# Altium PCB PCB-15_19_prototyp1.PcbDoc (part 4 of 4)
Units mm, origin at the board's own origin, x right, y up, seen from the top; angles counter-clockwise.
Board outline 190 x 150 mm, 8 copper layers (Top Layer, VCC3V3, Layer 2, layer 3, layer 4, layer 5, GND, Bottom Layer), stack 1.682 mm thick; 129 components, 396 nets, 1206 pads, 615 vias.
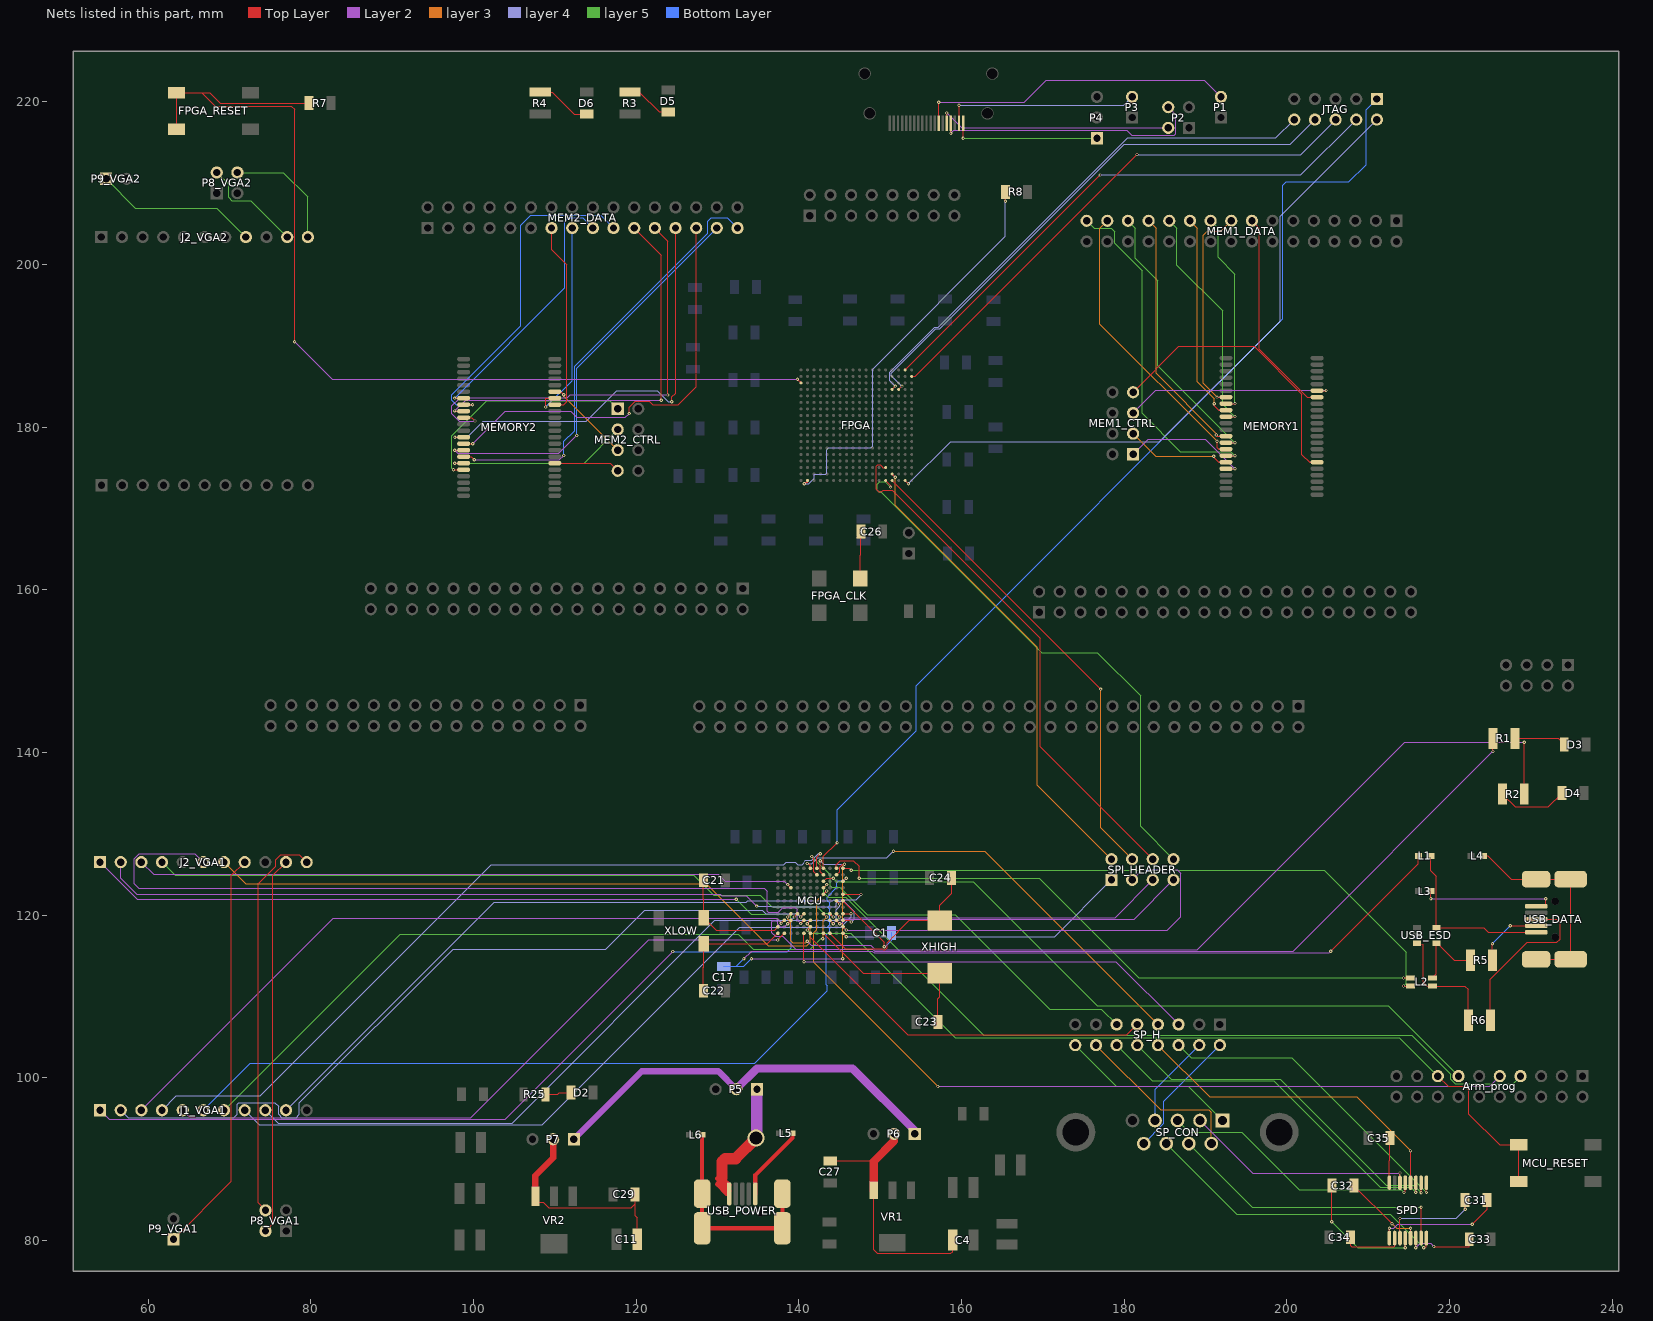
[diagram p10: the nets of this part, all layers, seen from the top]

## Via types
v1: diameter 0.4, hole 0.2, Top Layer to Bottom Layer, 599 vias
v2: diameter 0.4, hole 0.2, Top Layer to Bottom Layer, tented top, 8 vias
v3: diameter 7, hole 5, Top Layer to Bottom Layer, 4 vias
v4: diameter 1.3, hole 0.9, Top Layer to Bottom Layer, 3 vias
v5: diameter 2.1, hole 1.6, Top Layer to Bottom Layer, 1 vias

## Nets (pads, with @x,y where several pads share a name; then routed paths per layer and width w, separated by ;. In a path a pad name is that pad's centre, name@x,y a point inside that pad or via, vN(x,y) a via of type N, cw(c..) or ccw(c..) an arc to the next point about the centre after c; other vN are vias at no path point) (continued)
I_MEMORY.BUS6_Data_mem2: MEM2_DATA.13 MEMORY2.15 | length 23.7
  Top Layer w0.1: MEM2_DATA.13@109.601,204.47 109.601,201.831 111.455,199.977 111.455,183.143 111.071,182.759 MEMORY2.15@109.994,182.759
I_MEMORY.BUS7_Data_mem1: MEM1_DATA.15 MEMORY1.16 | length 25.7
  Top Layer w0.1: MEM1_DATA.15@195.707,205.359 196.621,204.445 196.621,189.553 202.489,183.686 MEMORY1.16@203.72,183.686
I_MEMORY.BUS7_Data_mem2: MEM2_DATA.15 MEMORY2.16 | length 25.5
  Top Layer w0.1: v1(108.89,182.474) 108.89,183.552 108.897,183.559 MEMORY2.16@109.994,183.559
  Bottom Layer w0.1: v1(108.89,182.474) 112.141,185.725 MEM2_DATA.15@112.141,204.47
I_MEMORY.BUS8_Data_mem1: MEM1_DATA.17 MEMORY1.29 | length 25.9
  Top Layer w0.1: v1(191.421,183.686) MEMORY1.29@192.52,183.686
  layer 3 w0.1: v1(191.421,183.686) 189.713,185.395 189.713,203.606 190.195,204.089 191.897,204.089 MEM1_DATA.17@193.167,205.359
I_MEMORY.BUS8_Data_mem2: MEM2_DATA.17 MEMORY2.29 | length 32.6
  Top Layer w0.1: v1(97.688,183.566) 97.695,183.559 MEMORY2.29@98.794,183.559
  Bottom Layer w0.1: v1(97.688,183.566) 111.227,197.104 111.227,205.232 111.735,205.74 113.411,205.74 MEM2_DATA.17@114.681,204.47
I_MEMORY.BUS9_Data_mem1: MEM1_DATA.19 MEMORY1.30 | length 24.8
  Top Layer w0.1: MEMORY1.30@192.52,182.886 v1(193.624,182.886)
  layer 5 w0.1: MEM1_DATA.19@190.627,205.359 191.541,204.445 191.541,200.863 193.624,198.78 v1(193.624,182.886)
I_MEMORY.BUS9_Data_mem2: MEM2_DATA.19 MEMORY2.30 | length 41.5
  Top Layer w0.1: MEMORY2.30@98.794,182.759 99.886,182.759 v1(99.892,182.753)
  Bottom Layer w0.1: v1(99.892,182.753) 97.866,182.753 97.333,183.286 97.333,183.998 105.791,192.456 105.791,204.826 107.01,206.045 115.646,206.045 MEM2_DATA.19@117.221,204.47
I_MEMORY.BUS10_Data_mem1: MEM1_DATA.21 MEMORY1.31 | length 25.6
  Top Layer w0.1: v1(191.06,182.88) 191.06,182.644 191.618,182.086 MEMORY1.31@192.52,182.086
  layer 3 w0.1: MEM1_DATA.21@188.087,205.359 189.001,204.445 189.001,185.572 191.06,183.514 v1(191.06,182.88)
I_MEMORY.BUS10_Data_mem2: MEM2_DATA.21 MEMORY2.31 | length 49.6
  Top Layer w0.1: v1(97.708,181.985) 97.735,181.959 MEMORY2.31@98.794,181.959 ; MEM2_DATA.21@119.761,204.47 123.088,201.143 v1(123.088,183.312)
  Layer 2 w0.1: v1(97.708,181.985) 99.035,183.312 v1(123.088,183.312)
I_MEMORY.BUS11_Data_mem1: MEM1_DATA.23 MEMORY1.32 | length 28.5
  Top Layer w0.1: MEMORY1.32@192.52,181.286 v1(193.624,181.286)
  layer 5 w0.1: MEM1_DATA.23@185.547,205.359 186.461,204.445 186.461,199.923 192.106,194.278 192.106,182.804 v1(193.624,181.286)
I_MEMORY.BUS11_Data_mem2: MEM2_DATA.23 MEMORY2.32 | length 54
  Top Layer w0.1: MEMORY2.32@98.794,181.159 99.779,181.159 v1(100.191,180.746) ; MEM2_DATA.23@122.301,204.47 123.901,202.87 v1(123.901,183.947)
  Layer 2 w0.1: v1(100.191,180.746) 98.273,180.746 97.358,181.661 97.358,182.601 98.36,183.603 111.528,183.603 111.873,183.947 v1(123.901,183.947)
I_MEMORY.BUS12_Data_mem1: MEM1_DATA.25 MEMORY1.35 | length 31
  Top Layer w0.1: v1(191.31,179.03) 191.454,178.886 MEMORY1.35@192.52,178.886
  layer 3 w0.1: MEM1_DATA.25@183.007,205.359 183.921,204.445 183.921,186.588 191.31,179.2 v1(191.31,179.03)
I_MEMORY.BUS12_Data_mem2: MEM2_DATA.25 MEMORY2.35 | length 52.2
  Top Layer w0.1: v1(97.713,178.765) 97.719,178.759 MEMORY2.35@98.794,178.759 ; v1(124.37,183.11) 124.37,183.704 124.841,184.175 MEM2_DATA.25@124.841,204.47
  layer 4 w0.1: v1(97.713,178.765) 99.227,178.765 101.182,180.721 113.894,180.721 117.627,184.455 122.583,184.455 123.927,183.11 v1(124.37,183.11)
I_MEMORY.BUS13_Data_mem1: MEM1_DATA.27 MEMORY1.36 | length 33.8
  Top Layer w0.1: MEMORY1.36@192.52,178.086 v1(193.624,178.086)
  layer 5 w0.1: MEM1_DATA.27@180.467,205.359 181.381,204.445 181.381,200.787 184.15,198.018 184.15,187.56 v1(193.624,178.086)
I_MEMORY.BUS13_Data_mem2: MEM2_DATA.27 MEMORY2.36 | length 52.4
  Top Layer w0.1: MEMORY2.36@98.794,177.959 99.892,177.959 v1(99.898,177.952) ; v1(119.151,181.661) 119.151,182.423 119.888,183.159 121.615,183.159 122.015,182.76 125.153,182.76 127.381,184.988 MEM2_DATA.27@127.381,204.47
  Layer 2 w0.1: v1(99.898,177.952) 103.911,181.966 111.938,181.966 112.708,181.195 118.686,181.195 v1(119.151,181.661)
I_MEMORY.BUS14_Data_mem1: MEM1_DATA.29 MEMORY1.37 | length 35.4
  Top Layer w0.1: v1(191.414,178.257) 191.414,177.489 191.618,177.286 MEMORY1.37@192.52,177.286
  layer 3 w0.1: MEM1_DATA.29@177.927,205.359 177.013,204.445 177.013,192.659 v1(191.414,178.257)
I_MEMORY.BUS14_Data_mem2: MEM2_DATA.29 MEMORY2.37 | length 49.8
  Top Layer w0.1: v1(97.688,177.165) 97.694,177.159 MEMORY2.37@98.794,177.159
  Layer 2 w0.1: v1(97.688,177.165) 98.095,176.759 110.49,176.759 v1(112.7,178.968)
  Bottom Layer w0.1: v1(112.7,178.968) 112.7,187.249 MEM2_DATA.29@129.921,204.47
I_MEMORY.BUS15_Data_mem1: MEM1_DATA.31 MEMORY1.38 | length 42.4
  Top Layer w0.1: MEMORY1.38@192.52,176.486 v1(193.624,176.486)
  layer 5 w0.1: MEM1_DATA.31@175.387,205.359 176.301,204.445 178.41,204.445 178.841,204.013 178.841,202.59 182.22,199.212 182.22,181.686 186.919,176.987 193.123,176.987 v1(193.624,176.486)
I_MEMORY.BUS15_Data_mem2: MEM2_DATA.31 MEMORY2.38 | length 53.2
  Top Layer w0.1: MEMORY2.38@98.794,176.359 99.714,176.359 v1(100.101,175.971)
  Layer 2 w0.1: v1(100.101,175.971) 110.566,175.971 v1(111.1,176.505)
  Bottom Layer w0.1: v1(111.1,176.505) 111.1,178.232 112.42,179.553 112.42,187.452 128.803,203.835 128.803,205.308 129.235,205.74 131.191,205.74 MEM2_DATA.31@132.461,204.47
I_MEMORY.ENABLE_Data_mem1: MEM1_CTRL.7 MEMORY1.6 | length 35.2
  Top Layer w0.1: MEM1_CTRL.7@181.102,184.277 186.741,189.916 195.97,189.916 201.864,184.023 201.864,176.616 202.794,175.686 MEMORY1.6@203.72,175.686
I_MEMORY.ENABLE_Data_mem2: MEM2_CTRL.7 MEMORY2.6 | length 8.1
  Top Layer w0.1: MEMORY2.6@109.994,175.559 116.795,175.559 MEM2_CTRL.7@117.729,174.625
I_MEMORY.LB_Data_mem1: MEM1_CTRL.3 MEMORY1.39 | length 12.9
  Top Layer w0.1: v1(191.008,176.403) 191.008,176.296 191.618,175.686 MEMORY1.39@192.52,175.686
  layer 3 w0.1: MEM1_CTRL.3@181.102,179.197 183.896,176.403 v1(191.008,176.403)
I_MEMORY.LB_Data_mem2: MEM2_CTRL.3 MEMORY2.39 | length 22.9
  Top Layer w0.1: v1(97.688,175.565) 97.694,175.559 MEMORY2.39@98.794,175.559
  layer 5 w0.1: v1(97.688,175.565) 113.589,175.565 MEM2_CTRL.3@117.729,179.705
I_MEMORY.UB_Data_mem1: MEM1_CTRL.1 MEMORY1.40 | length 15.9
  Top Layer w0.1: MEMORY1.40@192.52,174.886 193.617,174.886 v1(193.624,174.879)
  Layer 2 w0.1: MEM1_CTRL.1@181.102,176.657 182.956,178.511 189.992,178.511 v1(193.624,174.879)
I_MEMORY.UB_Data_mem2: MEM2_CTRL.1 MEMORY2.40 | length 28.1
  Top Layer w0.1: v1(97.536,174.759) MEMORY2.40@98.794,174.759
  layer 5 w0.1: v1(97.536,174.759) 97.333,174.962 97.333,178.918 101.625,183.21 116.764,183.21 MEM2_CTRL.1@117.729,182.245
I_MEMORY.WRITE_Data_mem1: MEM1_CTRL.5 MEMORY1.17 | length 26
  Top Layer w0.1: MEMORY1.17@203.72,184.486 204.806,184.486 v1(204.826,184.506)
  Layer 2 w0.1: MEM1_CTRL.5@181.102,181.737 183.871,184.506 v1(204.826,184.506)
I_MEMORY.WRITE_Data_mem2: MEM2_CTRL.5 MEMORY2.17 | length 10.8
  Top Layer w0.1: MEMORY2.17@109.994,184.359 110.795,184.277 v1(111.1,183.972)
  layer 3 w0.1: v1(111.1,183.972) 111.1,183.794 MEM2_CTRL.5@117.729,177.165
I_SPI.CLK: MCU.J9 SPI_HEADER.5 | length 42.1
  Top Layer w0.1: MCU.J9@143.829,119.354 144.221,118.962 v1(144.221,118.948)
  Layer 2 w0.1: v1(144.221,118.948) 144.678,119.405 145.364,119.405 145.66,119.701 178.883,119.701 SPI_HEADER.5@183.515,124.333
I_SPI.CS: MCU.J10 SPI_HEADER.7 | length 43.8
  Top Layer w0.1: MCU.J10@144.629,119.354 v1(145.034,118.948)
  Layer 2 w0.1: v1(145.034,118.948) 145.24,118.948 145.793,119.501 181.223,119.501 SPI_HEADER.7@186.055,124.333
I_SPI.RX: MCU.K11 SPI_HEADER.3 | length 54.4
  Top Layer w0.1: MCU.K11@145.429,118.554 v1(145.821,118.162)
  Layer 2 w0.1: v1(145.821,118.162) 185.319,118.162 186.969,119.812 186.969,125.171 186.538,125.603 182.245,125.603 SPI_HEADER.3@180.975,124.333
I_SPI.TX: MCU.L11 SPI_HEADER.1 | length 36.1
  Top Layer w0.1: MCU.L11@145.429,117.754 v1(145.835,117.348)
  layer 4 w0.1: v1(145.835,117.348) 171.45,117.348 SPI_HEADER.1@178.435,124.333
MCU_LEDS.LED_1: MCU.J3 R1.1 | length 105.9
  Top Layer w0.1: v1(138.633,118.948) 138.633,118.958 MCU.J3@139.029,119.354 ; v1(225.345,140.128) R1.1@225.345,141.732
  Layer 2 w0.1: v1(138.633,118.948) 138.252,118.567 137.693,118.567 137.389,118.872 137.389,119.177 137.262,119.304 136.804,119.304 136.677,119.177 136.677,117.856 137.16,117.373 138.024,117.373 139.624,115.773 149.119,115.773 149.342,115.55 200.767,115.55 v1(225.345,140.128)
MCU_LEDS.LED_2: MCU.H3 R2.1 | length 111.4
  Top Layer w0.1: v1(138.633,119.758) MCU.H3@139.029,120.154 ; R2.1@229.188,134.874 v1(229.188,141.249)
  Layer 2 w0.1: v1(141.038,116.798) 141.529,116.307 148.868,116.307 149.425,115.75 188.978,115.75 214.478,141.249 v1(229.188,141.249)
  layer 3 w0.1: v1(138.633,119.758) 138.633,119.46 139.014,119.079 139.014,116.84 139.257,116.598 140.838,116.598 v1(141.038,116.798)
MCU_VGA-I/O.J1_P2: J1_VGA1.9 MCU.F10 | length 83.9
  Top Layer w0.1: MCU.F10@144.629,121.754 145.022,121.361 v1(145.034,121.361)
  layer 4 w0.1: J1_VGA1.9@74.41,96.012 75.985,94.437 104.75,94.437 129.692,119.38 144.526,119.38 144.628,119.482 144.628,120.653 145.034,121.059 v1(145.034,121.361)
MCU_VGA-I/O.J1_P3: J1_VGA1.10 MCU.E11 | length 83.9
  Top Layer w0.1: MCU.E11@145.429,122.554 147.626,122.554 v1(147.65,122.53)
  layer 4 w0.1: J1_VGA1.10@76.95,96.012 102.523,121.585 133.538,121.585 133.746,121.793 144.16,121.793 144.278,121.911 147.032,121.911 v1(147.65,122.53)
MCU_VGA-I/O.J1_P8: J1_VGA1.8 MCU.H11 | length 87.2
  Top Layer w0.1: MCU.H11@145.429,120.154 v1(146.419,120.154)
  layer 4 w0.1: J1_VGA1.8@71.87,96.012 73.648,94.234 108.458,94.234 132.74,118.516 145.161,118.516 146.419,119.774 v1(146.419,120.154)
MCU_VGA-I/O.J1_P9: J1_VGA1.7 MCU.H8 | length 87.3
  Top Layer w0.1: MCU.H8@143.029,120.154 143.422,119.761 v1(143.434,119.761)
  layer 5 w0.1: J1_VGA1.7@69.33,96.012 90.971,117.653 132.563,117.653 134.391,115.824 141.402,115.824 142.668,117.09 v1(142.94,117.09)
  layer 3 w0.1: v1(142.94,117.09) 143.002,117.152 143.002,119.329 v1(143.434,119.761)
MCU_VGA-I/O.J1_P10: J1_VGA1.6 MCU.C11 | length 99.6
  Top Layer w0.1: MCU.C11@145.429,124.154 145.811,124.536 v1(145.821,124.536)
  Bottom Layer w0.1: J1_VGA1.6@66.79,96.012 72.556,101.778 134.569,101.778 143.49,110.699 143.49,111.33 143.376,111.444 143.376,117.606 143.779,118.009 143.779,118.299 143.535,118.543 143.535,118.556 143.784,118.804 143.784,119.094 143.559,119.319 143.559,119.391 143.784,119.616 143.784,119.906 143.553,120.137 143.553,120.183 143.779,120.409 143.779,120.699 143.538,120.94 143.538,120.968 143.779,121.209 143.779,121.499 143.49,121.788 143.49,122.205 144.678,123.393 144.678,124.003 144.882,124.206 145.491,124.206 v1(145.821,124.536)
MCU_VGA-I/O.J1_P11: J1_VGA1.5 MCU.L2 | length 83.7
  Top Layer w0.1: v1(137.417,116.942) MCU.L2@138.229,117.754
  Layer 2 w0.1: J1_VGA1.5@64.25,96.012 65.164,95.098 99.678,95.098 121.522,116.942 v1(137.417,116.942)
MCU_VGA-I/O.J1_P12: J1_VGA1.4 MCU.A7 | length 96.2
  Top Layer w0.1: MCU.A7@142.229,125.754 142.229,127.141 v1(142.621,127.533)
  layer 4 w0.1: J1_VGA1.4@61.71,96.012 63.463,97.765 73.762,97.765 102.159,126.162 138.125,126.162 138.481,126.517 139.572,126.517 139.883,126.206 140.411,126.206 140.593,126.387 140.818,126.721 141.597,126.721 142.41,127.533 v1(142.621,127.533)
MCU_VGA-I/O.J1_P13: J1_VGA1.3 MCU.J2 | length 89.3
  Top Layer w0.1: v1(137.82,118.99) 137.865,118.99 MCU.J2@138.229,119.354
  Layer 2 w0.1: J1_VGA1.3@59.17,96.012 82.757,119.599 137.271,119.599 137.82,119.05 v1(137.82,118.99)
MCU_VGA-I/O.J1_P14: J1_VGA1.2 MCU.H5 | length 99.1
  Top Layer w0.1: v1(140.233,119.761) 140.236,119.761 MCU.H5@140.629,120.154
  layer 4 w0.1: J1_VGA1.2@56.63,96.012 57.57,95.072 70.536,95.072 70.968,95.504 70.968,96.723 71.171,96.926 75.59,96.926 76.048,96.469 76.048,95.504 76.454,95.098 78.181,95.098 78.588,95.504 78.588,96.901 97.511,115.824 116.281,115.824 121.031,120.574 135.509,120.574 135.915,120.167 139.827,120.167 v1(140.233,119.761)
MCU_VGA-I/O.J1_P15: J1_VGA1.1 MCU.H4 | length 98.7
  Top Layer w0.1: v1(139.421,119.761) 139.436,119.761 MCU.H4@139.829,120.154
  Layer 2 w0.1: J1_VGA1.1@54.09,96.012 55.208,94.894 103.886,94.894 v1(124.511,115.519)
  Bottom Layer w0.1: v1(124.511,115.519) 138.582,115.519 139.04,115.976 139.04,119.38 v1(139.421,119.761)
MCU_VGA-I/O.J2_P0: J2_VGA1.6 MCU.J5 | length 99.5
  Top Layer w0.1: v1(140.233,118.958) MCU.J5@140.629,119.354
  Layer 2 w0.1: J2_VGA1.6@66.79,126.51 65.741,127.559 58.928,127.559 58.268,126.898 58.268,123.876 58.826,123.317 135.738,123.317 136.124,122.93 136.124,120.472 136.246,120.351 137.47,120.351 138.024,120.904 139.576,120.904 139.779,120.701 139.779,119.413 v1(140.233,118.958)
MCU_VGA-I/O.J2_P1: J2_VGA1.7 MCU.J6 | length 79.5
  Top Layer w0.1: v1(141.023,118.946) 141.023,118.948 MCU.J6@141.429,119.354
  layer 3 w0.1: J2_VGA1.7@69.33,126.51 72.015,123.825 128.626,123.825 136.22,116.23 140.995,116.23 141.402,116.637 141.402,118.567 v1(141.023,118.946)
MCU_VGA-I/O.J2_P4: J2_VGA1.3 MCU.D3 | length 81.2
  Top Layer w0.1: v1(138.633,123.749) MCU.D3@139.029,123.354
  Layer 2 w0.1: J2_VGA1.3@59.17,126.51 60.661,125.019 130.096,125.019 130.96,124.155 138.227,124.155 v1(138.633,123.749)
MCU_VGA-I/O.J2_P5: J2_VGA1.2 MCU.J11 | length 97.2
  Top Layer w0.1: MCU.J11@145.429,119.354 146.228,119.354 v1(146.431,119.151)
  Layer 2 w0.1: J2_VGA1.2@56.63,126.51 56.63,124.523 58.572,122.58 130.327,122.58 130.531,122.377 133.553,122.377 v1(134.823,121.107)
  layer 4 w0.1: v1(134.823,121.107) 136.677,121.107 136.781,121.004 144.577,121.004 144.628,121.055 144.628,121.457 144.882,121.711 145.497,121.711 146.787,120.421 146.787,119.507 v1(146.431,119.151)
MCU_VGA-I/O.J2_P6: J2_VGA1.4 MCU.H9 | length 85.9
  Top Layer w0.1: MCU.H9@143.829,120.154 v1(144.221,119.761)
  layer 5 w0.1: J2_VGA1.4@61.71,126.51 63.303,124.917 127.051,124.917 129.54,122.428 135.255,122.428 136.677,121.006 142.277,121.006 143.078,120.204 143.778,120.204 v1(144.221,119.761)
MCU_VGA-I/O.J2_P7: J2_VGA1.1 MCU.H10 | length 94.8
  Top Layer w0.1: MCU.H10@144.629,120.154 145.022,119.761 v1(145.034,119.761)
  Layer 2 w0.1: J2_VGA1.1@54.09,126.51 58.655,121.945 v1(132.309,121.945)
  layer 5 w0.1: v1(132.309,121.945) 134.137,120.117 138.786,120.117 138.989,119.913 138.989,119.609 139.243,119.355 144.628,119.355 v1(145.034,119.761)
Net_13: ?.13 P1.2 | length 39.3
  Top Layer w0.1: ?.13@157.195,217.367 v1(157.195,219.939)
  Layer 2 w0.1: v1(157.195,219.939) 167.716,219.939 170.434,222.656 189.84,222.656 P1.2@191.897,220.599
Net_15: ?.15 P2.2 | length 29.2
  Top Layer w0.1: v1(158.191,218.618) 158.195,218.614 ?.15@158.195,217.367
  Layer 2 w0.1: v1(158.191,218.618) 160.02,216.789 P2.2@185.42,216.789
Net_16: ?.16 P2.4 | length 33
  Top Layer w0.1: ?.16@158.695,217.367 158.695,216.133 v1(158.699,216.129)
  Layer 2 w0.1: v1(158.699,216.129) 159.055,216.484 180.315,216.484 180.924,215.875 186.131,215.875 186.334,216.078 186.334,218.415 P2.4@185.42,219.329
Net_18: ?.18 P3.2 | length 23.9
  Top Layer w0.1: ?.18@159.695,217.367 v1(159.695,219.583)
  layer 4 w0.1: v1(159.695,219.583) 179.959,219.583 P3.2@180.975,220.599
Net_19: ?.19 P4.1 | length 18.3
  Top Layer w0.1: v1(160.195,215.519) ?.19@160.195,217.367
  layer 5 w0.1: v1(160.195,215.519) P4.1@176.657,215.519
NetArm_prog_7: Arm_prog.7 MCU.D8 | length 97.8
  Top Layer w0.1: MCU.D8@143.029,123.354 143.424,123.749 v1(143.434,123.749)
  layer 5 w0.1: v1(143.434,123.749) 143.078,123.393 143.078,122.733 143.637,122.174 145.796,122.174 162.738,105.232 215.338,105.232 220.153,100.417 220.153,99.811 220.675,99.289 227.813,99.289 Arm_prog.7@228.727,100.203
NetArm_prog_9: Arm_prog.9 MCU.E8 | length 101.2
  Top Layer w0.1: MCU.E8@143.029,122.554 143.434,122.959 v1(143.434,122.961)
  Layer 2 w0.1: v1(157.099,98.933) 224.917,98.933 Arm_prog.9@226.187,100.203
  layer 3 w0.1: v1(143.434,122.961) 142.215,121.742 142.215,118.212 141.859,117.856 141.859,114.173 v1(157.099,98.933)
NetArm_prog_13: Arm_prog.13 MCU.C8 | length 88.3
  Top Layer w0.1: MCU.C8@143.029,124.154 143.411,124.536 v1(144.247,124.536)
  layer 5 w0.1: v1(144.247,124.536) 144.678,124.104 161.442,124.104 176.708,108.839 212.471,108.839 Arm_prog.13@221.107,100.203
NetArm_prog_15: Arm_prog.15 MCU.K6 MCU_RESET.1 MCU_RESET.3 | length 105.2
  Top Layer w0.1: v1(141.021,118.161) 141.036,118.161 MCU.K6@141.429,118.554 ; Arm_prog.15@218.567,100.203 219.837,98.933 221.894,98.933 222.377,98.45 222.377,95.534 226.162,91.749 MCU_RESET.3@228.517,91.749 MCU_RESET.1@228.517,87.249
  layer 5 w0.1: v1(141.021,118.161) 141.427,117.754 146.406,117.754 159.233,104.927 213.843,104.927 Arm_prog.15@218.567,100.203
NetC1_1: C1.1 MCU.F11 | length 9.9
  Top Layer w0.1: MCU.F11@145.429,121.754 150.5,116.683 v1(150.5,116.1)
  Bottom Layer w0.1: v1(150.5,116.1) 150.613,116.1 151.415,116.902 C1.1@151.415,117.817
NetC4_2: C4.2 C27.2 P6.2 VR1.3 | length 35.4
  Top Layer w0.1: C27.2@143.86,89.77 148.742,89.77 149.211,89.301 VR1.3@149.211,86.156 149.211,78.842 149.643,78.41 158.699,78.41 158.915,78.626 C4.2@158.915,80.04 ; 151.71,92.22 P6.2@151.71,93.1
  Top Layer w1: VR1.3@149.211,86.156 149.211,89.721 151.71,92.22
NetC11_2: C11.2 C29.2 P7.2 VR2.3 | length 27
  Top Layer w0.1: VR2.3@107.606,85.406 107.606,84.709 108.585,84.709 109.245,84.049 119.397,84.049 119.88,84.531 ; C29.2@119.88,85.66 119.88,84.531 ; C11.2@120.125,80.15 120.125,82.779 119.88,83.024 119.88,84.531
  Top Layer w0.8: VR2.3@107.606,85.406 107.606,87.966 109.8,90.16 P7.2@109.8,92.44
NetC17_2: C17.2 L1.1 MCU.B8 MCU.B10 | length 123.8
  Top Layer w0.1: v1(142.646,126.67) 142.646,125.337 MCU.B8@143.029,124.954 ; MCU.B10@144.629,124.954 145.034,125.359 145.034,125.908 145.39,126.263 v1(145.618,126.263) ; v1(205.41,115.57) 216.163,126.323 L1.1@216.163,127.271
  Layer 2 w0.1: v1(133.248,114.63) 134.188,115.57 149.039,115.57 149.259,115.35 205.19,115.35 v1(205.41,115.57) ; v1(134.173,114.63) v1(145.415,114.63)
  layer 3 w0.1: v1(145.415,114.63) 145.415,126.06 v1(145.618,126.263)
  layer 4 w0.1: v1(142.646,126.67) 143.053,126.263 v1(145.618,126.263)
  Bottom Layer w0.1: C17.2@130.761,113.706 132.324,113.706 ; v1(133.248,114.63) 132.324,113.706 ; v1(134.173,114.63) 133.248,113.706 132.324,113.706
NetC21_2: C21.2 MCU.K1 XLOW.1 | length 14.6
  Top Layer w0.1: C21.2@128.268,124.294 128.268,121.981 128.304,121.945 XLOW.1@128.304,119.671 128.304,119.659 129.828,118.135 137.01,118.135 MCU.K1@137.429,118.554
NetC22_2: C22.2 MCU.L1 XLOW.4 | length 15.4
  Top Layer w0.1: C22.2@128.268,110.705 128.268,113.563 128.304,113.599 XLOW.4@128.304,116.459 ; XLOW.4@128.304,116.471 XLOW.4@128.304,116.459 ; MCU.L1@137.429,117.754 136.134,116.459 XLOW.4@128.304,116.459
NetC23_2: C23.2 MCU.L8 XHIGH.1 | length 22.4
  Top Layer w0.1: MCU.L8@143.029,117.754 147.943,112.84 XHIGH.1@157.33,112.84 157.33,109.968 157.09,109.728 C23.2@157.09,106.87
NetC24_2: C24.2 MCU.L9 XHIGH.2 | length 22
  Top Layer w0.1: MCU.L9@143.829,117.754 145.713,115.87 150.235,115.87 150.355,115.75 150.645,115.75 150.85,115.955 150.85,116.585 153.605,119.34 XHIGH.2@157.33,119.34 157.33,121.209 158.79,122.669 C24.2@158.79,124.57
NetC31_1: C31.1 SPD.3 | length 12
  Top Layer w0.1: SPD.3@213.909,80.293 v1(213.909,82.702) ; C31.1@221.916,84.963 221.916,83.824 v1(221.92,83.82)
  layer 4 w0.1: v1(213.909,82.702) 220.802,82.702 v1(221.92,83.82)
NetC31_2: C31.2 SPD.1 | length 15.3
  Top Layer w0.1: SPD.1@212.609,80.293 v1(212.609,81.483) ; v1(222.783,81.991) 224.616,83.824 C31.2@224.616,84.963
  Layer 2 w0.1: v1(212.609,81.483) 213.157,81.483 213.665,81.991 v1(222.783,81.991)
NetC32_1: C32.1 SPD.5 | length 10.4
  Top Layer w0.1: C32.1@208.233,86.741 v1(212.932,82.042) ; SPD.5@215.209,80.293 215.209,81.478 v1(215.214,81.483)
  layer 3 w0.1: v1(212.932,82.042) 213.491,81.483 v1(215.214,81.483)
NetC32_2: C32.2 SPD.4 | length 16
  Top Layer w0.1: v1(205.533,82.296) C32.2@205.533,86.741 ; v1(214.554,79.096) 214.559,79.101 SPD.4@214.559,80.293
  layer 5 w0.1: v1(205.533,82.296) 208.733,79.096 v1(214.554,79.096)
NetC33_2: C33.2 SPD.6 | length 9.1
  Top Layer w0.1: v1(215.849,79.096) 215.859,79.105 SPD.6@215.859,80.293 ; v1(218.084,79.248) 222.424,79.248 C33.2@222.424,80.137
  Layer 2 w0.1: v1(215.849,79.096) 216.408,79.654 217.678,79.654 v1(218.084,79.248)
NetC34_2: C34.2 SPD.2 | length 7.6
  Top Layer w0.1: C34.2@207.852,80.391 207.852,79.321 207.975,79.198 213.157,79.198 213.259,79.301 SPD.2@213.259,80.293
NetC35_2: C35.2 SPD.16 | length 5.5
  Top Layer w0.1: SPD.16@212.609,87.093 212.609,89.789 212.678,89.858 C35.2@212.678,92.583
NetD2_1: D2.1 R25.2 | length 3.2
  Top Layer w0.1: R25.2@108.86,97.96 108.86,97.99 110.342,97.99 110.522,98.17 D2.1@111.99,98.17
NetD3_1: D3.1 R1.2 | length 6.4
  Top Layer w0.1: R1.2@228.045,141.732 233.346,141.732 D3.1@234.108,140.97
NetD4_1: D4.1 R2.2 | length 8.7
  Top Layer w0.1: R2.2@226.488,134.874 228.063,133.299 232.152,133.299 D4.1@233.854,135.001
NetD5_1: D5.1 R3.2 | length 5.7
  Top Layer w0.1: R3.2@119.253,221.187 120.371,221.187 122.817,218.741 D5.1@123.952,218.741
NetD6_1: D6.1 R4.2 | length 6.8
  Top Layer w0.1: R4.2@108.204,221.187 109.703,221.187 112.403,218.487 D6.1@113.919,218.487
NetFPGA_A17: FPGA.A17 JTAG.4 | length 68.2
  Top Layer w0.1: FPGA.A17@153.07,187.03 v1(177.038,210.998)
  layer 4 w0.1: v1(177.038,210.998) 201.727,210.998 JTAG.4@208.534,217.805
NetFPGA_B18: FPGA.B18 JTAG.6 | length 65.2
  Top Layer w0.1: FPGA.B18@153.87,186.23 154.294,186.23 v1(181.577,213.512)
  layer 4 w0.1: v1(181.577,213.512) 201.701,213.512 JTAG.6@205.994,217.805
NetFPGA_C1: FPGA.C1 FPGA_RESET.1 FPGA_RESET.3 R7.1 | length 126.5
  Top Layer w0.1: FPGA_RESET.1@63.5,216.62 FPGA_RESET.3@63.5,221.12 66.611,221.12 ; v1(78.003,190.5) 78.003,219.05 77.597,219.456 68.275,219.456 66.611,221.12 ; R7.1@79.803,219.837 68.847,219.837 67.564,221.12 66.611,221.12 ; v1(139.823,185.877) FPGA.C1@140.27,185.43
  Layer 2 w0.1: v1(78.003,190.5) 82.626,185.877 v1(139.823,185.877)
NetFPGA_D15: FPGA.D15 JTAG.10 | length 65.2
  Top Layer w0.1: FPGA.D15@151.47,184.63 151.867,185.027 v1(151.867,185.039)
  layer 4 w0.1: v1(151.867,185.039) 151.181,185.725 151.181,186.741 156.718,192.278 157.169,192.278 180.436,215.544 198.653,215.544 JTAG.10@200.914,217.805
NetFPGA_D16: FPGA.D16 JTAG.8 | length 67.7
  Top Layer w0.1: FPGA.D16@152.27,184.63 v1(152.679,185.039)
  layer 4 w0.1: v1(152.679,185.039) 151.384,186.334 151.384,186.639 156.822,192.078 157.315,192.078 179.994,214.757 200.406,214.757 JTAG.8@203.454,217.805
NetFPGA_V2: FPGA.V2 R8.1 | length 51
  Top Layer w0.1: v1(140.665,173.025) 140.868,173.228 141.07,173.228 FPGA.V2@141.07,173.43 ; v1(165.401,207.772) R8.1@165.401,208.915
  layer 4 w0.1: v1(140.665,173.025) 141.224,173.025 141.884,173.685 141.884,174.168 141.91,174.193 143.281,174.193 143.434,174.346 143.434,177.216 143.662,177.444 148.854,177.444 149.073,177.663 149.073,187.122 165.401,203.45 v1(165.401,207.772)
NetFPGA_V17: FPGA.V17 JTAG.2 | length 84.2
  Top Layer w0.1: FPGA.V17@153.07,173.43 v1(153.471,173.029)
  layer 4 w0.1: v1(153.471,173.029) 158.648,178.206 184.328,178.206 199.161,193.04 199.161,205.892 JTAG.2@211.074,217.805
NetJ2_VGA1_8: J2_VGA1.8 P9_VGA1.1 | length 50
  Top Layer w0.1: P9_VGA1.1@63.119,80.137 70.231,87.249 70.231,124.871 J2_VGA1.8@71.87,126.51
NetJ2_VGA1_10: J2_VGA1.10 P8_VGA1.2 | length 46.4
  Top Layer w0.1: P8_VGA1.2@74.422,81.153 75.336,82.067 75.336,124.896 J2_VGA1.10@76.95,126.51
NetJ2_VGA1_11: J2_VGA1.11 P8_VGA1.4 | length 48.8
  Top Layer w0.1: P8_VGA1.4@74.422,83.693 73.508,84.607 73.508,123.85 75.667,126.009 75.667,126.797 76.302,127.432 78.568,127.432 J2_VGA1.11@79.49,126.51
NetJ2_VGA2_8: J2_VGA2.8 P9_VGA2.1 | length 20.2
  layer 5 w0.1: P9_VGA2.1@54.83,210.52 58.416,206.934 68.446,206.934 J2_VGA2.8@72.02,203.36
NetJ2_VGA2_10: J2_VGA2.10 P8_VGA2.2 | length 12.9
  layer 5 w0.1: P8_VGA2.2@68.43,211.3 69.901,209.829 69.901,208.255 70.307,207.848 72.612,207.848 J2_VGA2.10@77.1,203.36
NetJ2_VGA2_11: J2_VGA2.11 P8_VGA2.4 | length 14.8
  layer 5 w0.1: P8_VGA2.4@70.97,211.3 76.632,211.3 79.64,208.292 J2_VGA2.11@79.64,203.36
NetJTAG_1: JTAG.1 MCU.A8 | length 127.3
  Top Layer w0.1: MCU.A8@143.029,125.754 143.029,127.235 v1(144.704,128.91)
  Bottom Layer w0.1: v1(144.704,128.91) 144.704,132.944 154.432,142.672 154.432,148.209 199.517,193.294 199.517,209.702 199.949,210.134 207.62,210.134 209.753,212.268 209.753,219.024 JTAG.1@211.074,220.345
NetL1_2: L1.2 USB_DATA.1 USB_ESD.5 | length 21.6
  Top Layer w0.1: L1.2@217.713,127.271 217.713,125.451 218.392,124.772 USB_ESD.5@218.392,118.442 224.231,118.442 224.783,117.89 USB_DATA.1@230.67,117.89
NetL2_1: L2.1 MCU.A10 | length 78.1
  Top Layer w0.1: MCU.A10@144.629,125.754 144.629,126.214 145.11,126.695 146.71,126.695 147.422,125.984 v1(147.422,124.536) ; v1(214.351,112.268) 214.36,112.277 L2.1@215.207,112.277
  layer 5 w0.1: v1(147.422,124.536) 169.545,124.536 181.813,112.268 v1(214.351,112.268)
NetL2_2: L2.2 R5.1 USB_ESD.4 | length 9.5
  Top Layer w0.1: L2.2@217.907,112.277 218.392,112.762 USB_ESD.4@218.392,116.542 218.491,116.542 220.606,114.427 222.573,114.427 R5.1@222.573,114.444
NetL2_3: L2.3 R6.1 USB_ESD.3 | length 15.2
  Top Layer w0.1: USB_ESD.3@215.992,116.542 216.789,116.434 216.789,111.76 217.272,111.277 L2.3@217.907,111.277 221.894,111.277 222.319,110.852 R6.1@222.319,107.078
NetL2_4: L2.4 MCU.A11 | length 78.7
  Top Layer w0.1: MCU.A11@145.429,125.754 146.204,125.754 v1(146.431,125.527) ; v1(214.351,111.277) L2.4@215.207,111.277
  layer 5 w0.1: v1(146.431,125.527) 204.597,125.527 214.706,115.418 214.706,111.633 v1(214.351,111.277)
NetL3_2: L3.2 USB_DATA.5 | length 17.1
  Top Layer w0.1: v1(217.713,121.996) L3.2@217.713,122.953 ; USB_DATA.5@230.67,121.09 231.826,121.09 v1(231.826,121.996)
  Layer 2 w0.1: v1(217.713,121.996) v1(231.826,121.996)
NetL4_2: L4.2 USB_DATA.6 USB_DATA.7 USB_DATA.8 USB_DATA.9 | length 26
  Top Layer w0.1: L4.2@224.19,127.271 224.728,127.271 227.584,124.415 USB_DATA.8@230.645,124.415 USB_DATA.9@234.895,124.415 USB_DATA.7@234.895,114.565 USB_DATA.6@230.645,114.565
NetL5_2: L5.2 USB_POWER.5 | length 9.3
  Top Layer w0.5: USB_POWER.5@134.645,85.725 134.645,88.035 139.195,92.585 L5.2@139.195,93.18
NetL6_2: L6.2 USB_POWER.6 USB_POWER.7 USB_POWER.8 USB_POWER.9 | length 25.6
  Top Layer w0.5: L6.2@128.125,92.99 128.12,92.88 USB_POWER.6@128.12,85.75 USB_POWER.7@128.12,81.5 USB_POWER.9@137.97,81.5 USB_POWER.8@137.97,85.75
NetP5_1: P5.1 USB_POWER.1 | length 19.4
  Top Layer w0.1: 129.94,86.91 129.94,87.59 ; 131.125,85.725 USB_POWER.1@131.445,85.725
  Top Layer w0.5: 129.94,86.91 131.125,85.725 ; 129.94,87.59 USB_POWER.1@131.445,86.085 ; 130.56,87.67 USB_POWER.1@131.445,86.785
  Top Layer w1.4: 130.56,87.67 130.56,89.589 130.56,89.66 130.96,90.06 132.233,90.06 v5(134.743,92.57)
  Layer 2 w1.4: v5@134.85,92.66 P5.1@134.85,98.6
NetP5_2: P5.2 P6.1 P7.1 | length 50.9
  Layer 2 w0.1: P6.1@154.25,93.1 P6.1@154.25,93.5
  Layer 2 w0.8: P7.1@112.34,92.44 118.18,98.28 120.69,100.79 130.12,100.79 P5.2@132.31,98.6
  Layer 2 w1: P5.2@132.31,98.6 134.84,101.13 146.62,101.13 P6.1@154.25,93.5
NetR5_2: R5.2 USB_DATA.2 | length 8.4
  Top Layer w0.1: R5.2@225.273,114.444 v1(225.273,116.484) ; v1(227.479,118.69) USB_DATA.2@230.67,118.69
  Bottom Layer w0.1: v1(225.273,116.484) v1(227.479,118.69)
NetR6_2: R6.2 USB_DATA.3 | length 20.8
  Top Layer w0.1: R6.2@225.019,107.078 225.019,112.091 229.565,116.637 233.197,116.637 233.604,117.043 233.604,119.075 233.189,119.49 USB_DATA.3@230.67,119.49
NetSP_CON_1: SP_CON.1 SP_H.16 | length 22
  layer 5 w0.1: SP_H.16@173.99,104.013 179.019,98.984 187.859,98.984 SP_CON.1@192.103,94.74
NetSP_CON_2: SP_CON.2 SPD.14 | length 28.4
  Top Layer w0.1: SPD.14@213.909,87.093 v1(213.909,88.29)
  Layer 2 w0.1: SP_CON.2@189.333,94.74 195.783,88.29 v1(213.909,88.29)
NetSP_CON_3: SP_CON.3 SPD.13 | length 32.8
  Top Layer w0.1: v1(214.401,85.903) 214.559,86.06 SPD.13@214.559,87.093
  layer 5 w0.1: SP_CON.3@186.563,94.74 187.983,93.32 194.437,93.32 201.498,86.258 214.046,86.258 v1(214.401,85.903)
NetSP_CON_4: SP_CON.4 SP_H.4 | length 11.5
  Bottom Layer w0.1: SP_CON.4@183.793,94.74 183.793,98.576 SP_H.4@189.23,104.013
NetSP_CON_6: SP_CON.6 SP_H.14 | length 21.5
  layer 3 w0.1: SP_H.14@176.53,104.013 184.48,96.063 190.413,96.063 190.718,95.758 SP_CON.6@190.718,91.9
NetSP_CON_7: SP_CON.7 SPD.7 | length 35.6
  Top Layer w0.1: SPD.7@216.509,80.293 v1(216.509,84.074)
  layer 5 w0.1: SP_CON.7@187.948,91.9 195.774,84.074 v1(216.509,84.074)
NetSP_CON_8: SP_CON.8 SPD.8 | length 38.4
  Top Layer w0.1: v1(216.84,79.096) 217.159,79.237 SPD.8@217.159,80.293
  layer 5 w0.1: SP_CON.8@185.178,91.9 193.842,83.236 212.7,83.236 v1(216.84,79.096)
NetSP_CON_9: SP_CON.9 SP_H.2 | length 16
  Bottom Layer w0.1: SP_CON.9@182.408,91.9 184.887,94.379 184.887,97.13 SP_H.2@191.77,104.013
NetSP_H_6: SP_H.6 SPD.9 | length 39.2
  Top Layer w0.1: v1(217.159,85.903) SPD.9@217.159,87.093
  layer 5 w0.1: SP_H.6@186.69,104.013 188.239,102.464 200.598,102.464 v1(217.159,85.903)
NetSP_H_8: SP_H.8 SPD.12 | length 40.4
  Top Layer w0.1: SPD.12@215.209,87.093 v1(215.209,91.008)
  layer 3 w0.1: SP_H.8@184.15,104.013 190.525,97.638 208.58,97.638 v1(215.209,91.008)
NetSP_H_10: SP_H.10 SPD.10 | length 43.7
  Top Layer w0.1: v1(216.509,85.853) SPD.10@216.509,87.093
  layer 5 w0.1: SP_H.10@181.61,104.013 185.801,99.822 199.212,99.822 212.242,86.792 215.57,86.792 v1(216.509,85.853)
NetSP_H_12: SP_H.12 SPD.11 | length 45.5
  Top Layer w0.1: v1(215.849,85.913) 215.859,85.922 SPD.11@215.859,87.093
  layer 5 w0.1: SP_H.12@179.07,104.013 183.464,99.619 198.409,99.619 211.49,86.538 215.224,86.538 v1(215.849,85.913)
OUTPUT: C26.1 FPGA_CLK.3 | length 5.8
  Top Layer w0.1: FPGA_CLK.3@147.574,161.374 147.574,164.236 147.621,164.283 C26.1@147.621,167.148
SPI.BACKUP_CLK: FPGA.T14 SPI_HEADER.6 | length 65
  Top Layer w0.1: FPGA.T14@150.67,175.03 150.33,175.03 150.2,175.16 150.2,175.167 150.005,175.362 149.733,175.362 149.53,175.158 149.53,172.345 149.855,172.02 150.145,172.02 150.359,172.234 151.489,172.234 169.672,154.051 169.672,140.716 SPI_HEADER.6@183.515,126.873
SPI.BACKUP_CS: FPGA.V14 SPI_HEADER.8 | length 68.4
  Top Layer w0.1: FPGA.V14@150.67,173.43 151.282,172.818 v1(151.282,172.618)
  layer 5 w0.1: v1(151.282,172.618) 150.622,173.279 149.962,173.279 149.65,172.967 149.65,172.225 149.855,172.02 150.103,172.02 169.875,152.248 176.708,152.248 182.016,146.939 182.016,130.912 SPI_HEADER.8@186.055,126.873
SPI.BACKUP_RX: FPGA.V15 SPI_HEADER.4 | length 58.8
  Top Layer w0.1: FPGA.V15@151.47,173.43 v1(177.114,147.786)
  layer 3 w0.1: v1(177.114,147.786) 177.114,130.734 SPI_HEADER.4@180.975,126.873
SPI.BACKUP_TX: FPGA.U15 SPI_HEADER.2 | length 58.5
  Top Layer w0.1: FPGA.U15@151.47,174.23 v1(151.867,173.833)
  layer 3 w0.1: v1(151.867,173.833) 151.867,170.409 169.316,152.959 169.316,135.992 SPI_HEADER.2@178.435,126.873
UART0.CTRL_RX: MCU.L5 SP_H.5 | length 52.7
  Top Layer w0.1: v1(140.629,114.275) MCU.L5@140.629,117.754
  Layer 2 w0.1: v1(140.629,114.275) 178.968,114.275 SP_H.5@186.69,106.553
UART0.CTRL_TX: MCU.L6 SP_H.9 | length 46.2
  Top Layer w0.1: MCU.L6@141.429,117.754 141.429,117.272 153.418,105.283 180.34,105.283 SP_H.9@181.61,106.553
UART0.RX: MCU.A6 SP_H.7 | length 53.5
  Top Layer w0.1: v1(141.021,126.34) 141.224,126.34 141.429,126.135 MCU.A6@141.429,125.754
  layer 3 w0.1: v1(151.638,127.864) 162.839,127.864 SP_H.7@184.15,106.553
  layer 4 w0.1: v1(141.021,126.34) 141.616,126.34 142.296,127.02 150.794,127.02 v1(151.638,127.864)
UART0.TX: MCU.B7 SP_H.11 | length 49.3
  Top Layer w0.1: v1(141.58,127.203) 141.834,126.949 141.834,125.349 MCU.B7@142.229,124.954
  layer 5 w0.1: v1(141.58,127.203) 143.84,124.943 143.84,123.622 144.069,123.393 145.034,123.393 148.387,120.04 159.233,120.04 170.84,108.433 177.19,108.433 SP_H.11@179.07,106.553
pads on no net: ?. Arm_prog.2 Arm_prog.3 Arm_prog.5 Arm_prog.11 Arm_prog.17 Arm_prog.19 FPGA.A10 FPGA.A11 FPGA.A12 FPGA.A13 FPGA.A14 FPGA.A15 FPGA.A16 FPGA.B11 FPGA.B12 FPGA.B14 FPGA.B16 FPGA.C2 FPGA.C4 FPGA.C5 FPGA.C12 FPGA.C13 FPGA.C14 FPGA.C15 FPGA.D1 FPGA.D2 FPGA.D3 FPGA.D4 FPGA.D12 FPGA.D14 FPGA.E1 FPGA.E3 FPGA.E4 FPGA.E6 FPGA.E7 FPGA.E8 FPGA.E11 FPGA.E12 FPGA.E13 FPGA.F1 FPGA.F3 FPGA.F4 FPGA.F5 FPGA.F6 FPGA.F7 FPGA.F8 FPGA.F9 FPGA.F10 FPGA.F11 FPGA.F12 FPGA.F13 FPGA.G6 FPGA.G8 FPGA.G9 FPGA.G11 FPGA.H5 FPGA.H6 FPGA.H7 FPGA.L14 FPGA.M13 FPGA.M14 FPGA.M18 FPGA.N11 FPGA.N12 FPGA.N14 FPGA.N15 FPGA.N16 FPGA.N17 FPGA.N18 FPGA.P15 FPGA.P16 FPGA.R13 FPGA.T6 FPGA.T17 FPGA.T18 FPGA.U17 FPGA.U18 FPGA.V3 J1_VGA1.11 J1_VGA2.11 J2_VGA1.5 J2_VGA2.5 MCU.E5 MCU.E6 MCU.E7 MCU.F5 MCU.F6 MCU.F7 MCU.G5 MCU.G6 MCU.G7 P1.1 P2.1 P2.3 P3.1 P4.2 P4.3 P8_VGA1.1 P8_VGA1.3 P8_VGA2.1 P8_VGA2.3 P9_VGA1.2 P9_VGA2.2 USB_DATA.4 USB_DATA.X USB_DATA.Y USB_ESD.1 USB_POWER.2 USB_POWER.3 USB_POWER.4 USB_POWER.X USB_POWER.Y VR1.4 VR2.4 XLOW.2 XLOW.3
copper on no net:
  other v3: 235.703,81.779 56.379,82.033 235.449,220.971 56.125,221.098

## Polygon pours and split planes (outlines as drawn)
3.3V on VCC3V3 (split plane): 240.29,76.71 51.31,76.71 51.31,225.69 240.29,225.69
GND on GND (split plane): 240.29,76.71 51.31,76.71 51.31,225.69 240.29,225.69

## Keep-outs
Keep-Out Layer:
  lines w0.3: 52.1,77.5 52.1,224.9 239.5,224.9 239.5,77.5 52.1,77.5

## Silkscreen, mask and mechanical layers (free items; w line width, h text height)
Top Overlay:
  lines w0.254: 95.686,114.89 96.846,116.05 ; 100.61,117.3 102.04,118.73 ; 211.043,189.72 212.083,190.76 ; 211.043,190.76 211.043,191
  text "DEMOLICIOUS" at 65.65,128.61 h4.1 r10
  text "Aleksander Gustaw Wasaznik" at 82.03,126.69 h1.52
  text "Aleksander Vognild Burkow" at 82.03,123.49 h1.52
  text "Kristian Fladstad Normann" at 82.03,120.81 h1.52
  text "Christoffer Tonnessen" at 82.03,117.48 h1.52
  text "Andreas Love Selvik" at 82.03,114.92 h1.52
  text "Julian Ho-yin Lam" at 82.03,111.72 h1.52
  text "Eirik Jakobsen" at 82.03,107.88 h1.52
  text "Stian Jensen" at 82.03,104.94 h1.52
  text "Torkel Berli" at 82.03,102.12 h1.52

## Text inside footprints (layer, text, board x,y; h text height)
Arm_prog: Top Overlay "20" at 211.963,98.171 h1.27 r180; Top Overlay "19" at 211.963,100.711 h1.27 r180; Top Overlay "1" at 238.887,100.711 h1.27 r180; Top Overlay "2" at 238.887,98.171 h1.27 r180
EBI_address: Top Overlay "2" at 203.18,142.43 h1.27; Top Overlay "1" at 203.26,145.04 h1.27; Top Overlay "59" at 123.53,144.89 h1.27; Top Overlay "60" at 123.6,142.43 h1.27
EBI_DATA: Top Overlay "2" at 115.21,142.58 h1.27; Top Overlay "1" at 115.28,145.04 h1.27; Top Overlay "31" at 71.32,145.11 h1.27; Top Overlay "32" at 70.96,142.65 h1.27
GPIO: Top Overlay "2" at 237.109,148.717 h1.27 r180; Top Overlay "1" at 236.601,151.257 h1.27 r180; Top Overlay "7" at 225.425,151.257 h1.27 r180; Top Overlay "8" at 225.425,148.717 h1.27 r180
HDMI_header: Top Overlay "2" at 138.811,208.026 h1.27; Top Overlay "1" at 138.811,205.486 h1.27; Top Overlay "15" at 160.655,205.486 h1.27; Top Overlay "16" at 160.655,208.026 h1.27
JTAG: Top Overlay "10" at 199.39,218.313 h1.27 r180; Top Overlay "9" at 199.39,220.853 h1.27 r180; Top Overlay "1" at 213.106,220.853 h1.27 r180; Top Overlay "2" at 213.614,218.313 h1.27 r180
MEM1_ADDR: Top Overlay "2" at 167.005,159.258 h1.27; Top Overlay "1" at 167.005,156.718 h1.27; Top Overlay "37" at 216.789,156.718 h1.27; Top Overlay "38" at 216.789,159.258 h1.27
MEM1_CTRL: Top Overlay "2" at 179.07,174.117 h1.27 r90; Top Overlay "1" at 181.61,174.625 h1.27 r90; Top Overlay "7" at 181.61,185.801 h1.27 r90; Top Overlay "8" at 179.07,185.801 h1.27 r90
MEM1_DATA: Top Overlay "2" at 215.62,202.31 h1.27; Top Overlay "1" at 215.78,204.78 h1.27; Top Overlay "31" at 172.29,204.62 h1.27; Top Overlay "32" at 171.33,202.08 h1.27
MEM2_ADDR: Top Overlay "2" at 135.05,156.84 h1.27; Top Overlay "1" at 135.05,159.52 h1.27; Top Overlay "37" at 83.49,159.38 h1.27; Top Overlay "38" at 83.34,156.84 h1.27
MEM2_CTRL: Top Overlay "2" at 119.761,184.785 h1.27 r270; Top Overlay "1" at 117.221,184.277 h1.27 r270; Top Overlay "7" at 117.221,173.101 h1.27 r270; Top Overlay "8" at 119.761,173.101 h1.27 r270
MEM2_DATA: Top Overlay "2" at 91.821,206.502 h1.27; Top Overlay "1" at 91.821,203.962 h1.27; Top Overlay "31" at 133.985,203.962 h1.27; Top Overlay "32" at 133.985,206.502 h1.27
P2: Top Overlay "1" at 188.468,214.757 h1.27 r90; Top Overlay "2" at 185.928,214.249 h1.27 r90; Top Overlay "4" at 185.928,220.853 h1.27 r90; Top Overlay "3" at 188.468,220.853 h1.27 r90
P8_VGA1: Top Overlay "1" at 77.47,79.121 h1.27 r90; Top Overlay "2" at 74.93,78.613 h1.27 r90; Top Overlay "4" at 74.93,85.217 h1.27 r90; Top Overlay "3" at 77.47,85.217 h1.27 r90
P8_VGA2: Top Overlay "1" at 66.398,208.252 h1.27; Top Overlay "2" at 65.89,210.792 h1.27; Top Overlay "4" at 72.494,210.792 h1.27; Top Overlay "3" at 72.494,208.252 h1.27
SP_CON: Top Overlay "6" at 191.218,88.795 h1.5 r180; Top Overlay "9" at 182.908,88.795 h1.5 r180; Top Overlay "5" at 181.523,98.195 h1.5 r180; Top Overlay "1" at 192.353,98.195 h1.5 r180
SP_H: Top Overlay "2" at 193.675,103.251 h1.27; Top Overlay "1" at 193.675,106.172 h1.27; Top Overlay "15" at 170.18,106.045 h1.27; Top Overlay "16" at 170.18,103.251 h1.27
SPI_HEADER: Top Overlay "2" at 175.895,126.365 h1.27; Top Overlay "1" at 176.403,123.825 h1.27; Top Overlay "7" at 187.579,123.825 h1.27; Top Overlay "8" at 187.579,126.365 h1.27
?: Top Overlay "HDMI" at 158.805,214.797 h1.52 r180